# EAGLE board Pci 208825 20single 20stepper 20 FR4 (EAGLE 7.1.0)
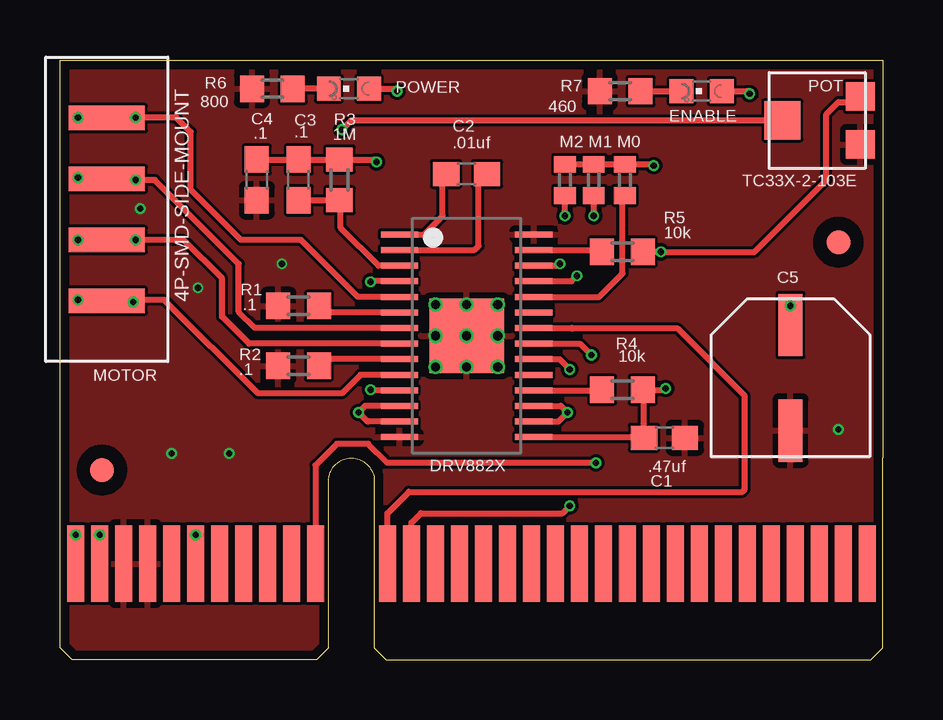
[diagram p0: board, top side]
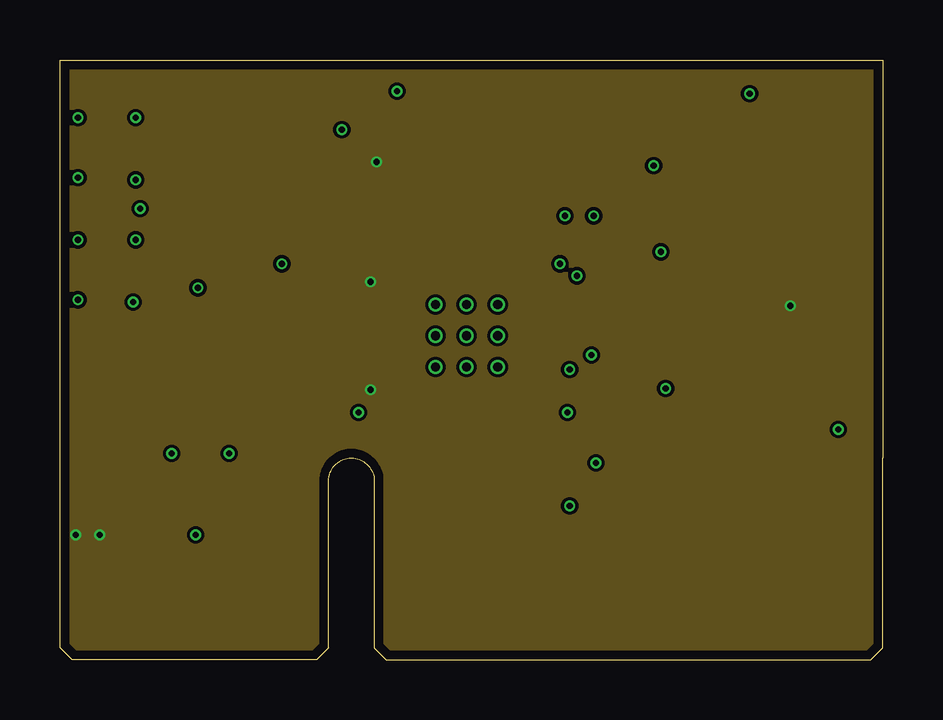
[diagram p1: board, inner layer Route2]
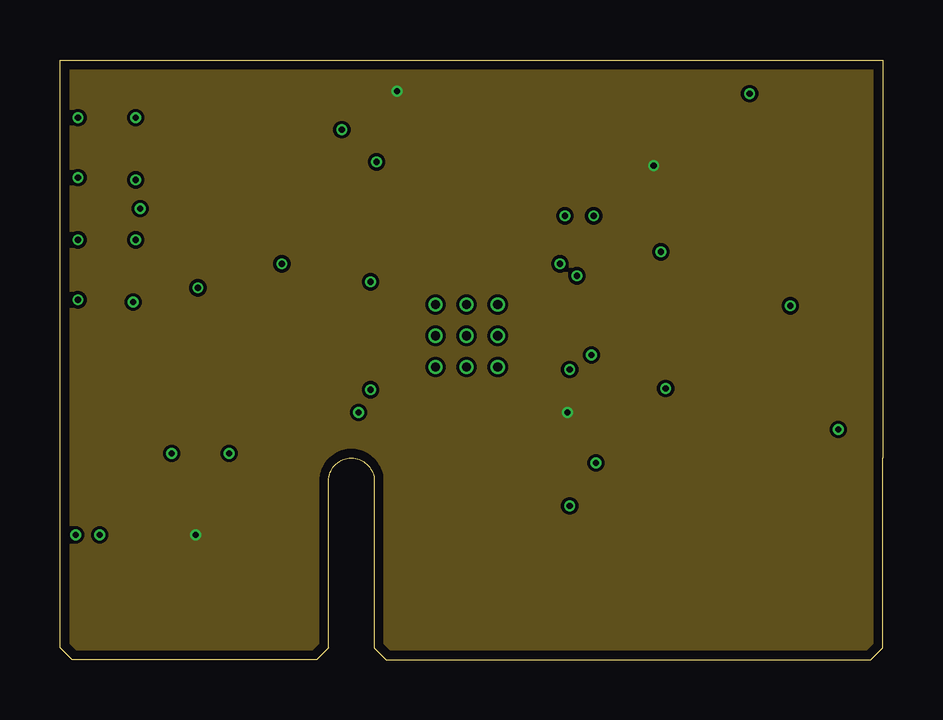
[diagram p2: board, inner layer Route15]
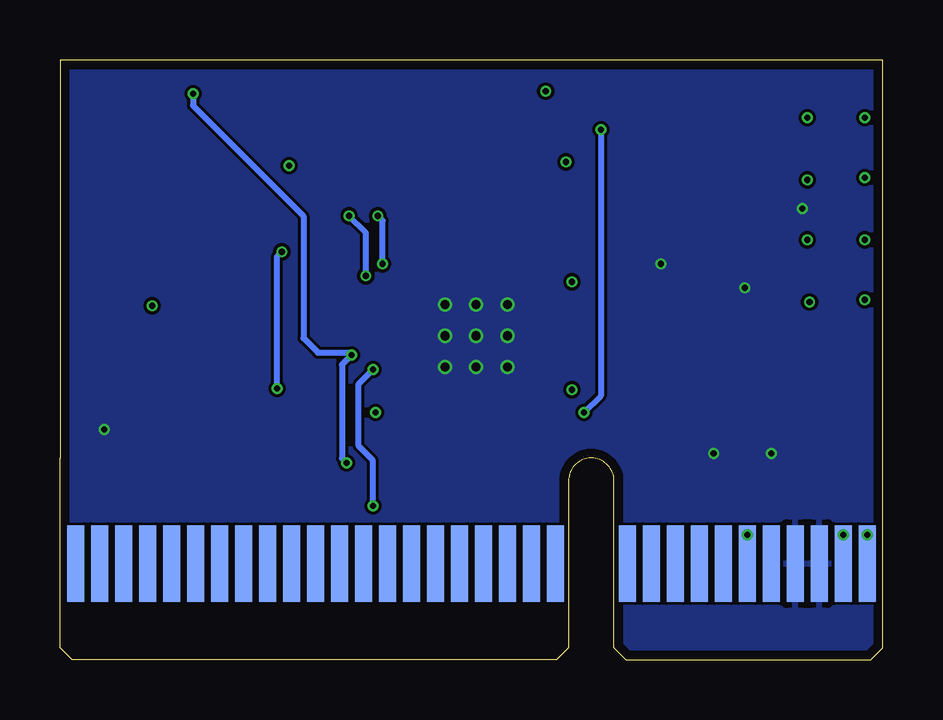
[diagram p3: board, bottom side, seen from below]

Size 34.3 x 25 mm. Coordinates in mm from the lower left corner, seen from the top.
Outline: 0,8.4 0,25 34.3,25 34.3,8.4
Copper layers (1*2*15*16): Top 0.035559375mm / dielectric 0.17018125mm / Route2 0.01778125mm / dielectric 47mil / Route15 0.01778125mm / dielectric 0.17018125mm / Bottom 0.035559375mm
Design rules "OSHPark-4layer *": minimum track width 5mil, minimum drill 10mil, track to track 5mil, track to pad 5mil, pad to pad 5mil, via to via 5mil, smd to smd 5mil, copper to edge 15mil, drill to drill 6mil, minimum pad ring 4mil, minimum via ring 4mil, stop-mask expansion 4mil, vias tented up to drill 25mil, thermal gap 10mil

## Footprints (pad centres in the part's own frame; a part is rotated, then mirrored left to right if it is on the bottom)
C0603 = smd 1.1 x 1: 1 -0.85,0; 2 0.85,0
EEEFTH101XAP = smd 1 x 2.6: P$1 0,-2.2; P$2 0,2.2
DRV8825 = drill 0.381 pad 0.5: GND -1.3,-1.3; GND@1 -1.3,1.3; GND@2 -1.3,0; GND@4 0,1.3; GND@5 0,0; GND@6 0,-1.3; GND@7 1.3,1.3; GND@8 1.3,0; GND@9 1.3,-1.3 | smd 0.25 x 1.55: P$1 -4.225,-2.8; P$2 -3.575,-2.8; P$3 -2.925,-2.8; P$4 -2.275,-2.8; P$5 -1.625,-2.8; P$6 -0.975,-2.8; P$7 -0.325,-2.8; P$8 0.325,-2.8; P$9 0.975,-2.8; P$10 1.625,-2.8; P$11 2.275,-2.8; P$12 2.925,-2.8; P$13 3.575,-2.8; P$14 4.225,-2.8; P$15 4.225,2.8; P$16 3.575,2.8; P$17 2.925,2.8; P$18 2.275,2.8; P$19 1.625,2.8; P$20 0.975,2.8; P$21 0.325,2.8; P$22 -0.325,2.8; P$23 -0.975,2.8; P$24 -1.625,2.8; P$25 -2.275,2.8; P$26 -2.925,2.8; P$27 -3.575,2.8; P$28 -4.225,2.8 | smd 3.1 x 3.1: P$29 0,0
CHIPLED_0603 = smd 0.991 x 0.991: A 0,-0.838; C 0,0.838
R0402 = smd 0.7 x 0.9: 1 -0.65,0; 2 0.65,0
4P-SMD-SIDE-MOUNT = smd 1.016 x 3.175: P$1 -5.08,0; P$2 -2.54,0; P$3 0,0; P$4 2.54,0
TC33X-2-103E = smd 1.2 x 1.2: P$1 -1,-1.8; P$2 1,-1.8 | smd 1.6 x 1.5: P$3 0,1.45
R0603 = smd 1 x 1.1: 1 -0.85,0; 2 0.85,0
64P-PCI-EXPRESS = smd 0.7 x 3.2: P$1 -11.5,4; P$2 -10.5,4; P$3 -9.5,4; P$4 -8.5,4; P$5 -7.5,4; P$6 -6.5,4; P$7 -5.5,4; P$8 -4.5,4; P$9 -3.5,4; P$10 -2.5,4; P$11 -1.5,4; P$12 1.5,4; P$13 2.5,4; P$14 3.5,4; P$15 4.5,4; P$16 5.5,4; P$17 6.5,4; P$18 7.5,4; P$19 8.5,4; P$20 9.5,4; P$21 10.5,4; P$22 11.5,4; P$23 12.5,4; P$24 13.5,4; P$25 14.5,4; P$26 15.5,4; P$27 16.5,4; P$28 17.5,4; P$29 18.5,4; P$30 19.5,4; P$31 20.5,4; P$32 21.5,4 | smd 0.7 x 3.2 bottom: P$33 21.5,4; P$34 20.5,4; P$35 19.5,4; P$36 18.5,4; P$37 17.5,4; P$38 16.5,4; P$39 15.5,4; P$40 14.5,4; P$41 13.5,4; P$42 12.5,4; P$43 11.5,4; P$44 10.5,4; P$45 9.5,4; P$46 8.5,4; P$47 7.5,4; P$48 6.5,4; P$49 5.5,4; P$50 4.5,4; P$51 3.5,4; P$52 2.5,4; P$53 1.5,4; P$54 -1.5,4; P$55 -2.5,4; P$56 -3.5,4; P$57 -4.5,4; P$58 -5.5,4; P$59 -6.5,4; P$60 -7.5,4; P$61 -8.5,4; P$62 -9.5,4; P$63 -10.5,4; P$64 -11.5,4
FIDUCIAL_1MM = smd 1 x 1: 1 0,0

## Placement (x,y rotation side)
C1  .47uf  [C0603]  25.2,9.25 0 top
C2  .01uf  [C0603]  16.95,20.25 180 top
C3  .1  [C0603]  9.95,20 90 top
C4  .1  [C0603]  8.2,20 270 top
C5  [EEEFTH101XAP]  30.45,11.75 180 top
DRV882X  [DRV8825]  16.95,13.5 270 top
ENABLE  [CHIPLED_0603]  26.75,23.7 90 top
M0  [R0402]  23.55,20 90 top
M1  [R0402]  22.25,20 90 top
M2  [R0402]  21.05,20 90 top
MOTOR  4P-SMD-SIDE-MOUNT  [4P-SMD-SIDE-MOUNT]  1.95,17.5 270 top
POT  TC33X-2-103E  [TC33X-2-103E]  31.57,22.48 90 top
POWER  [CHIPLED_0603]  12.05,23.8 90 top
R1  .1  [R0603]  9.95,14.75 0 top
R2  .1  [R0603]  9.95,12.25 0 top
R3  1M  [R0603]  11.65,20 270 top
R4  10k  [R0603]  23.45,11.25 0 top
R5  10k  [R0603]  23.45,17 0 top
R6  800  [R0603]  8.85,23.8 0 top
R7  460  [R0603]  23.35,23.7 0 top
U$1  64P-PCI-EXPRESS  [64P-PCI-EXPRESS]  12.15,0 0 top
U$2  FIDUCIAL  [FIDUCIAL_1MM]  32.45,17.4 0 top
U$3  FIDUCIAL  [FIDUCIAL_1MM]  1.75,7.9 0 top

## Library data of the parts
C1-C4 ENABLE M0 M1 M2 POWER R1-R7 U$2 U$3 = adafruit
C5 DRV882X MOTOR POT U$1 = austriamicrosystems

## Nets
+3.3V: C1.1 DRV882X.P$15 POT.P$2 R4.2 R5.2
+5V: DRV882X.P$16 DRV882X.P$17 M0.2 M1.2 M2.2 POWER.A U$1.P$6 U$1.P$59
A1: DRV882X.P$5 MOTOR.P$1
A2: DRV882X.P$7 MOTOR.P$2
B1: DRV882X.P$10 MOTOR.P$4
B2: DRV882X.P$8 MOTOR.P$3
DIR: DRV882X.P$20 U$1.P$13
ENBL1: DRV882X.P$21 ENABLE.A U$1.P$11
ENBL2: U$1.P$54
ENC-A: U$1.P$14
ENC-B: U$1.P$15
ENC-I: U$1.P$16
GND: C1.2 C4.2 C5.P$2 DRV882X.GND DRV882X.GND@1 DRV882X.GND@2 DRV882X.GND@4 DRV882X.GND@5 DRV882X.GND@6 DRV882X.GND@7 DRV882X.GND@8 DRV882X.GND@9 DRV882X.P$14 DRV882X.P$28 DRV882X.P$29 POT.P$1 R1.1 R2.1 R6.1 R7.1 U$1.P$3 U$1.P$4 U$1.P$61 U$1.P$62
N$1: DRV882X.P$26 M2.1
N$2: DRV882X.P$25 M1.1
N$3: DRV882X.P$24 M0.1
N$4: DRV882X.P$18 R4.1
N$5: U$1.P$5
N$6: POWER.C R6.2
N$7: U$1.P$7
N$8: U$1.P$8
N$9: U$1.P$9
N$10: U$1.P$10
N$11: ENABLE.C R7.2
N$17: U$1.P$17
N$18: U$1.P$18
N$19: U$1.P$19
N$20: U$1.P$20
N$21: U$1.P$21
N$22: U$1.P$22
N$23: U$1.P$23
N$24: U$1.P$24
N$25: U$1.P$25
N$26: U$1.P$26
N$27: U$1.P$27
N$28: U$1.P$28
N$29: U$1.P$29
N$30: U$1.P$30
N$31: U$1.P$31
N$32: U$1.P$32
N$33: U$1.P$33
N$34: U$1.P$34
N$35: U$1.P$35
N$36: U$1.P$36
N$37: U$1.P$37
N$38: U$1.P$38
N$39: U$1.P$39
N$40: U$1.P$40
N$41: U$1.P$41
N$42: U$1.P$42
N$43: U$1.P$43
N$44: U$1.P$44
N$45: U$1.P$45
N$46: U$1.P$46
N$47: U$1.P$47
N$55: U$1.P$55
N$56: U$1.P$56
N$57: U$1.P$57
N$58: U$1.P$58
N$60: U$1.P$60
N$68: DRV882X.P$27 R5.1
N$69: C2.2 DRV882X.P$1
N$70: C2.1 DRV882X.P$2
N$71: C3.1 DRV882X.P$3 R3.2
N$73: DRV882X.P$6 R1.2
N$76: DRV882X.P$9 R2.2
STEP: DRV882X.P$22 U$1.P$12
VDD: C3.2 C4.1 C5.P$1 DRV882X.P$4 DRV882X.P$11 R3.1 U$1.P$1 U$1.P$2 U$1.P$63 U$1.P$64
VREF: DRV882X.P$12 DRV882X.P$13 POT.P$3

## Tracks (layer width: path | path; a pad name or v marks a point on that pad's centre or on a via)
+3.3V  (via drill 0.25)
  Top 0.254: DRV882X.P$15 24.33,9.28 C1.1 24.35,11.2 R4.2 25.2,11.25 v25.25,11.3 | POT.P$2 33.14,23.25 32.45,23.25 31.95,22.75 31.95,20 28.95,17 v25.05,17 R5.2
  Bottom 0.254: v25.25,11.3 25.25,16.8 v25.05,17
+5V  (via drill 0.25)
  Top 0.254: v5.65,5.2 U$1.P$59 | DRV882X.P$16 20.77,9.93 v21.15,10.3 20.88,10.57 DRV882X.P$17 | M2.2 M1.2 M0.2 24.7,20.65 v24.75,20.6 | POWER.A 13.95,23.8 v14.05,23.7
  Bottom 0.254: U$1.P$59 v5.65,5.2
  pour Route15: -7.51,30.43 43.04,30.43 43.04,-9.35 -7.51,-9.35
A1  (via drill 0.25)
  Top 0.254: DRV882X.P$5 12.43,15.12 10.05,17.5 7.55,17.5 5.45,19.6 5.45,22 4.85,22.6 v3.15,22.6 1.97,22.6 MOTOR.P$1 0.77,22.58 v0.75,22.6
A2  (via drill 0.25)
  Top 0.254: DRV882X.P$7 8.13,13.82 7.45,14.5 7.45,16.5 3.95,20 v3.15,20 1.99,20 MOTOR.P$2 0.81,20.04 v0.75,20.1
B1  (via drill 0.25)
  Top 0.254: DRV882X.P$10 12.53,11.88 11.75,11.1 8.25,11.1 4.35,15 2.95,15 | v0.75,15 0.79,14.96 MOTOR.P$4 1.99,15 2.95,15 | 2.95,15 v3.05,14.9
B2  (via drill 0.25)
  Top 0.254: DRV882X.P$8 7.88,13.18 6.75,14.3 6.75,15.9 5.15,17.5 v3.15,17.5 MOTOR.P$3 v0.75,17.5
DIR  (via drill 0.25)
  Top 0.254: U$1.P$13 14.65,5.7 15.05,6.1 20.95,6.1 v21.25,6.4 | DRV882X.P$20 20.83,12.53 v21.25,12.1
  Bottom 0.254: v21.25,6.4 21.25,8.3 21.85,8.9 21.85,11.5 v21.25,12.1
ENBL1  (via drill 0.25)
  Top 0.254: DRV882X.P$21 21.68,13.18 v22.15,12.7 | v22.35,8.2 13.65,8.2 12.85,9 11.55,9 10.65,8.1 U$1.P$11 | ENABLE.A 28.65,23.7 v28.75,23.6
  Bottom 0.254: v22.35,8.2 22.55,8.4 22.55,12.3 v22.15,12.7 22.25,12.8 23.55,12.8 24.15,13.4 24.15,18.5 28.75,23.1 v28.75,23.6
GND  (via drill 0.25)
  other vias: 9.25,16.5 5.75,15.5 3.35,18.8 32.45,9.6 4.65,8.6 7.05,8.6
  pour Top: -2.05,27.5 37.95,27.5 37.95,-4.5 -2.05,-4.5
  pour Bottom: -3.05,28.5 38.95,28.5 38.95,-5.5 -3.05,-5.5
N$1  (via drill 0.25)
  Top 0.254: DRV882X.P$26 20.77,16.43 v20.85,16.5 | v21.05,18.5 M2.1
  Bottom 0.254: v20.85,16.5 20.85,18.3 v21.05,18.5
N$2  (via drill 0.25)
  Top 0.254: DRV882X.P$25 21.33,15.78 v21.55,16 | v22.25,18.5 M1.1
  Bottom 0.254: v21.55,16 21.55,17.8 v22.25,18.5
N$3
  Top 0.254: DRV882X.P$24 22.48,15.12 23.45,16.1 23.45,19.25 M0.1
N$4
  Top 0.254: DRV882X.P$18 22.58,11.22 R4.1
N$6
  Top 0.254: POWER.C R6.2
N$11
  Top 0.254: R7.2 ENABLE.C
N$68
  Top 0.254: DRV882X.P$27 22.52,17.07 R5.1
N$69
  Top 0.254: DRV882X.P$1 15.18,17.73 15.95,18.5 15.95,20.1 C2.2
N$70
  Top 0.254: DRV882X.P$2 17.27,17.07 17.45,17.25 17.45,19.9 C2.1
N$71
  Top 0.254: C3.1 R3.2 11.7,19.1 11.7,18 13.28,16.43 DRV882X.P$3
N$73
  Top 0.254: DRV882X.P$6 11.08,14.47 R1.2
N$76
  Top 0.254: DRV882X.P$9 11.08,12.53 R2.2
STEP
  Top 0.254: U$1.P$12 13.65,6.1 14.55,7 28.45,7 28.55,7.1 28.55,11 25.75,13.8 21.35,13.8 21.33,13.82 DRV882X.P$22
VDD  (via drill 0.25)
  Top 0.254: DRV882X.P$11 12.98,11.22 v12.95,11.25 | DRV882X.P$4 12.98,15.78 v12.95,15.75 | C4.1 C3.2 R3.1 13.1,20.85 v13.2,20.75 | C5.P$1 v30.45,14.75 | v0.65,5.2 U$1.P$64 | v1.65,5.2 U$1.P$63
  Bottom 0.254: U$1.P$64 v0.65,5.2 | U$1.P$63 v1.65,5.2
  pour Route2: -4.87,29.51 40.6,29.51 40.6,-6.86 -4.87,-6.86
VREF  (via drill 0.25)
  Top 0.254: POT.P$3 12.13,22.48 v11.75,22.1 | DRV882X.P$12 12.73,10.57 v12.45,10.3 12.83,9.93 DRV882X.P$13
  Bottom 0.254: v11.75,22.1 11.75,11 v12.45,10.3